# Altium PCB PCB1.PcbDoc
Units mm, origin at the board's own origin, x right, y up, seen from the top; angles counter-clockwise.
Board outline 41.25 x 43.63 mm, 2 copper layers (Top Layer, Bottom Layer); 10 components, 13 nets, 62 pads, 15 vias.
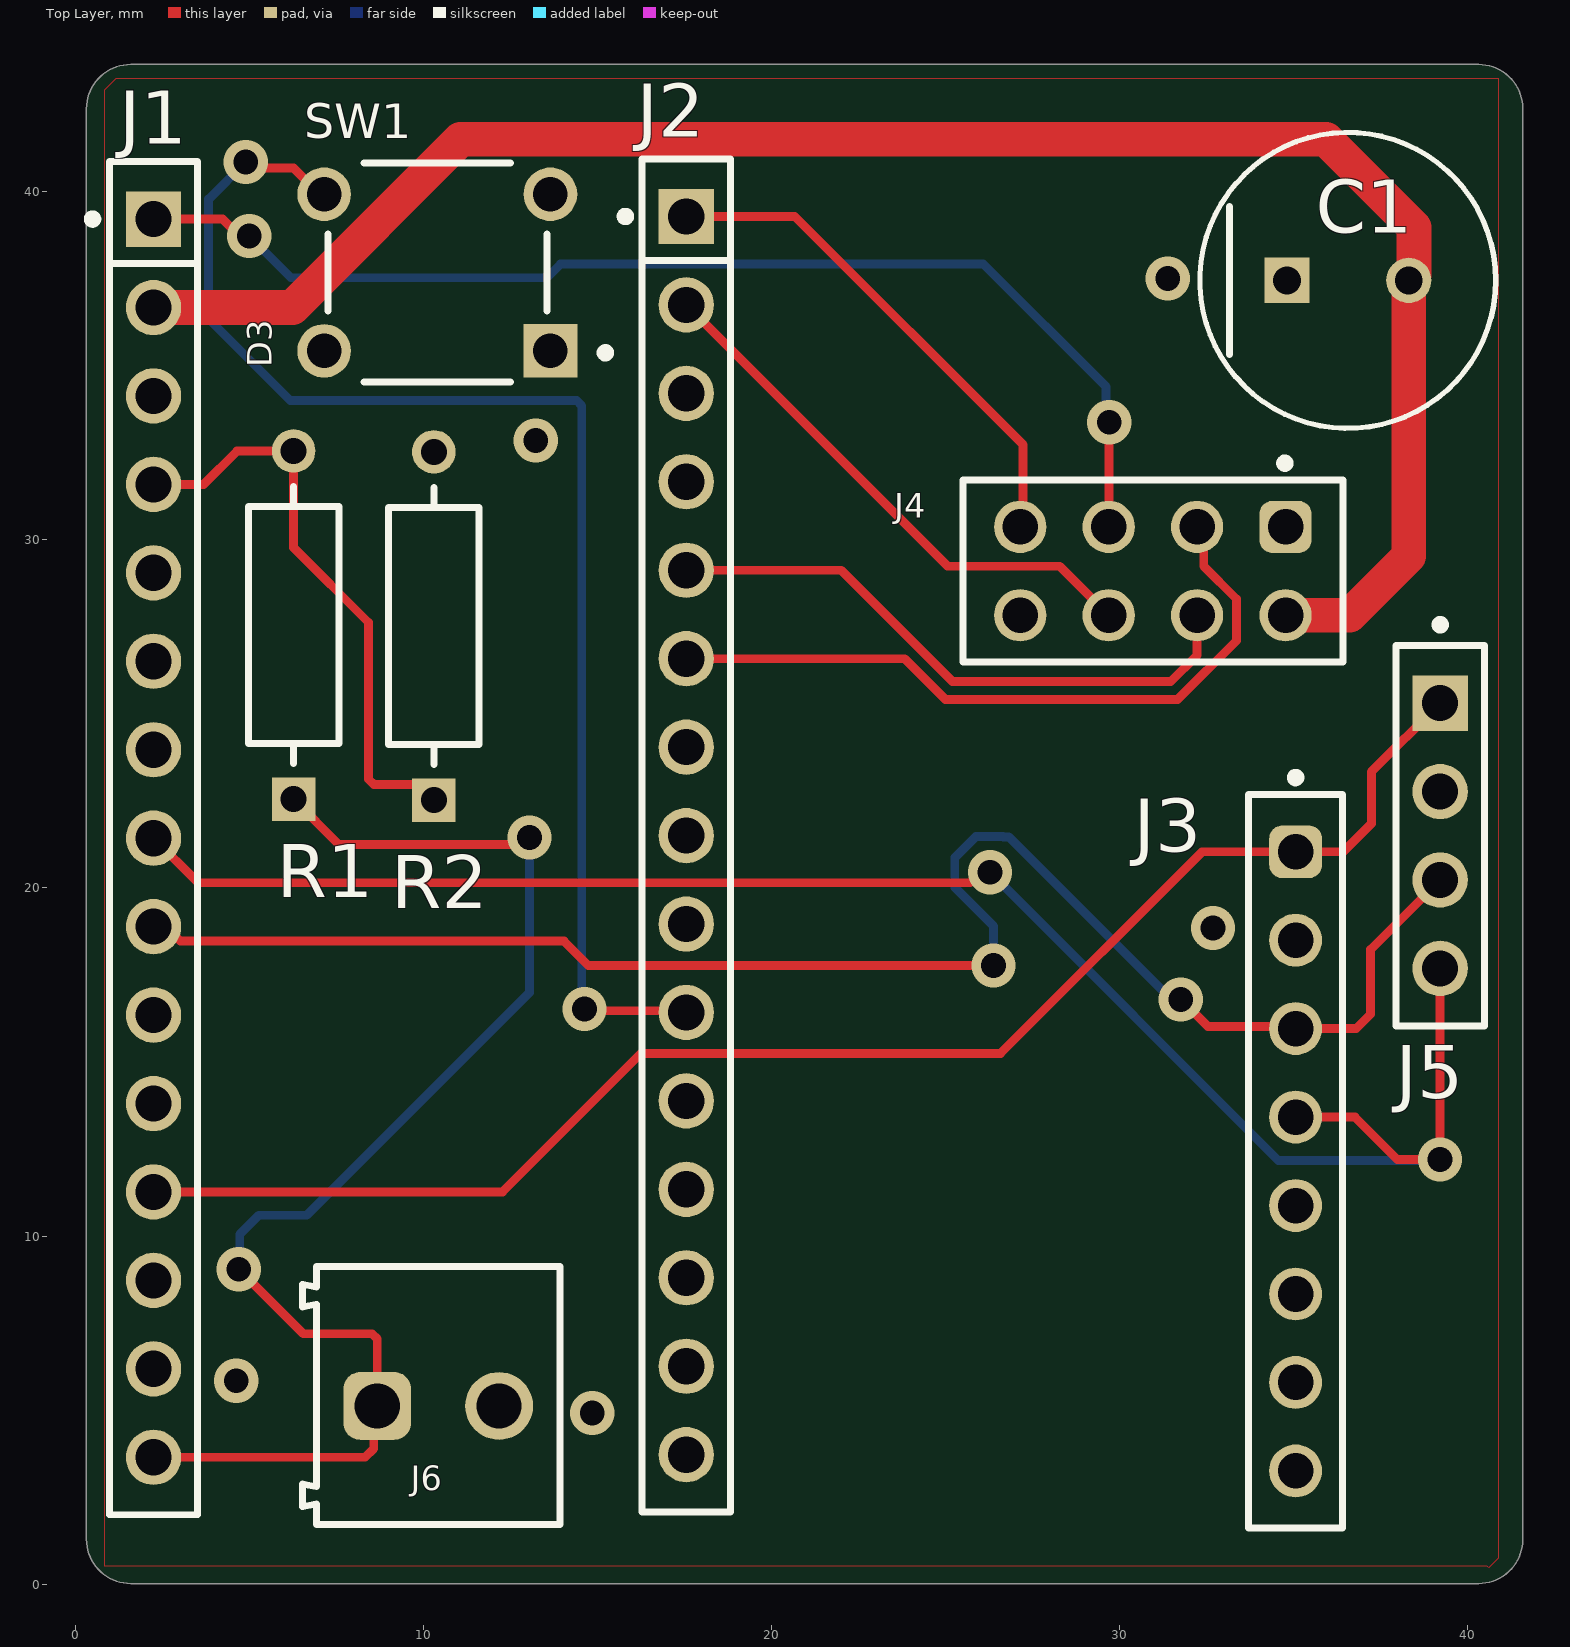
[diagram p0: Top Layer view]
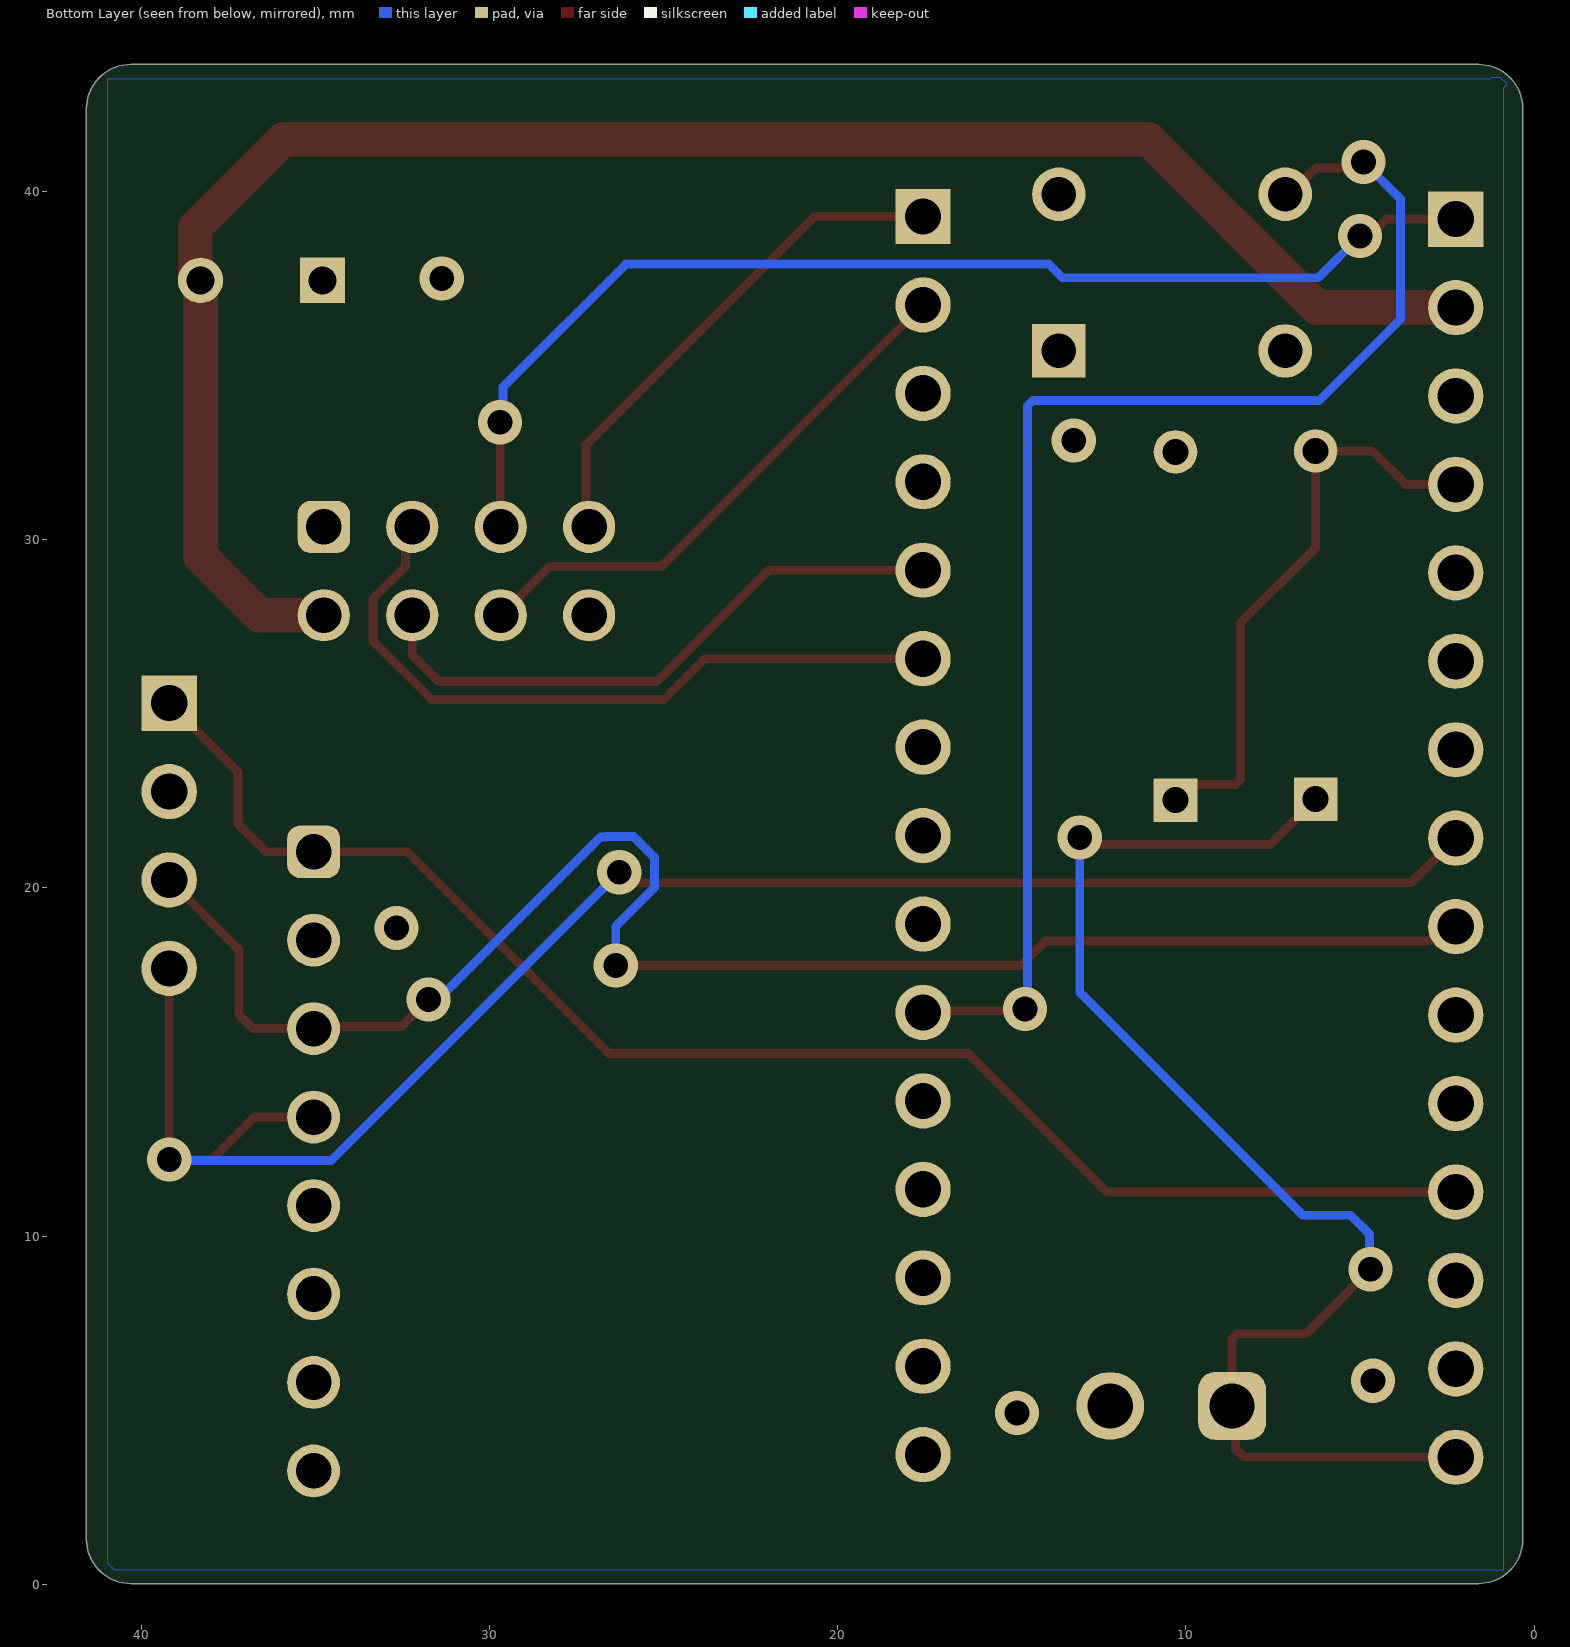
[diagram p1: Bottom Layer view, seen from below]
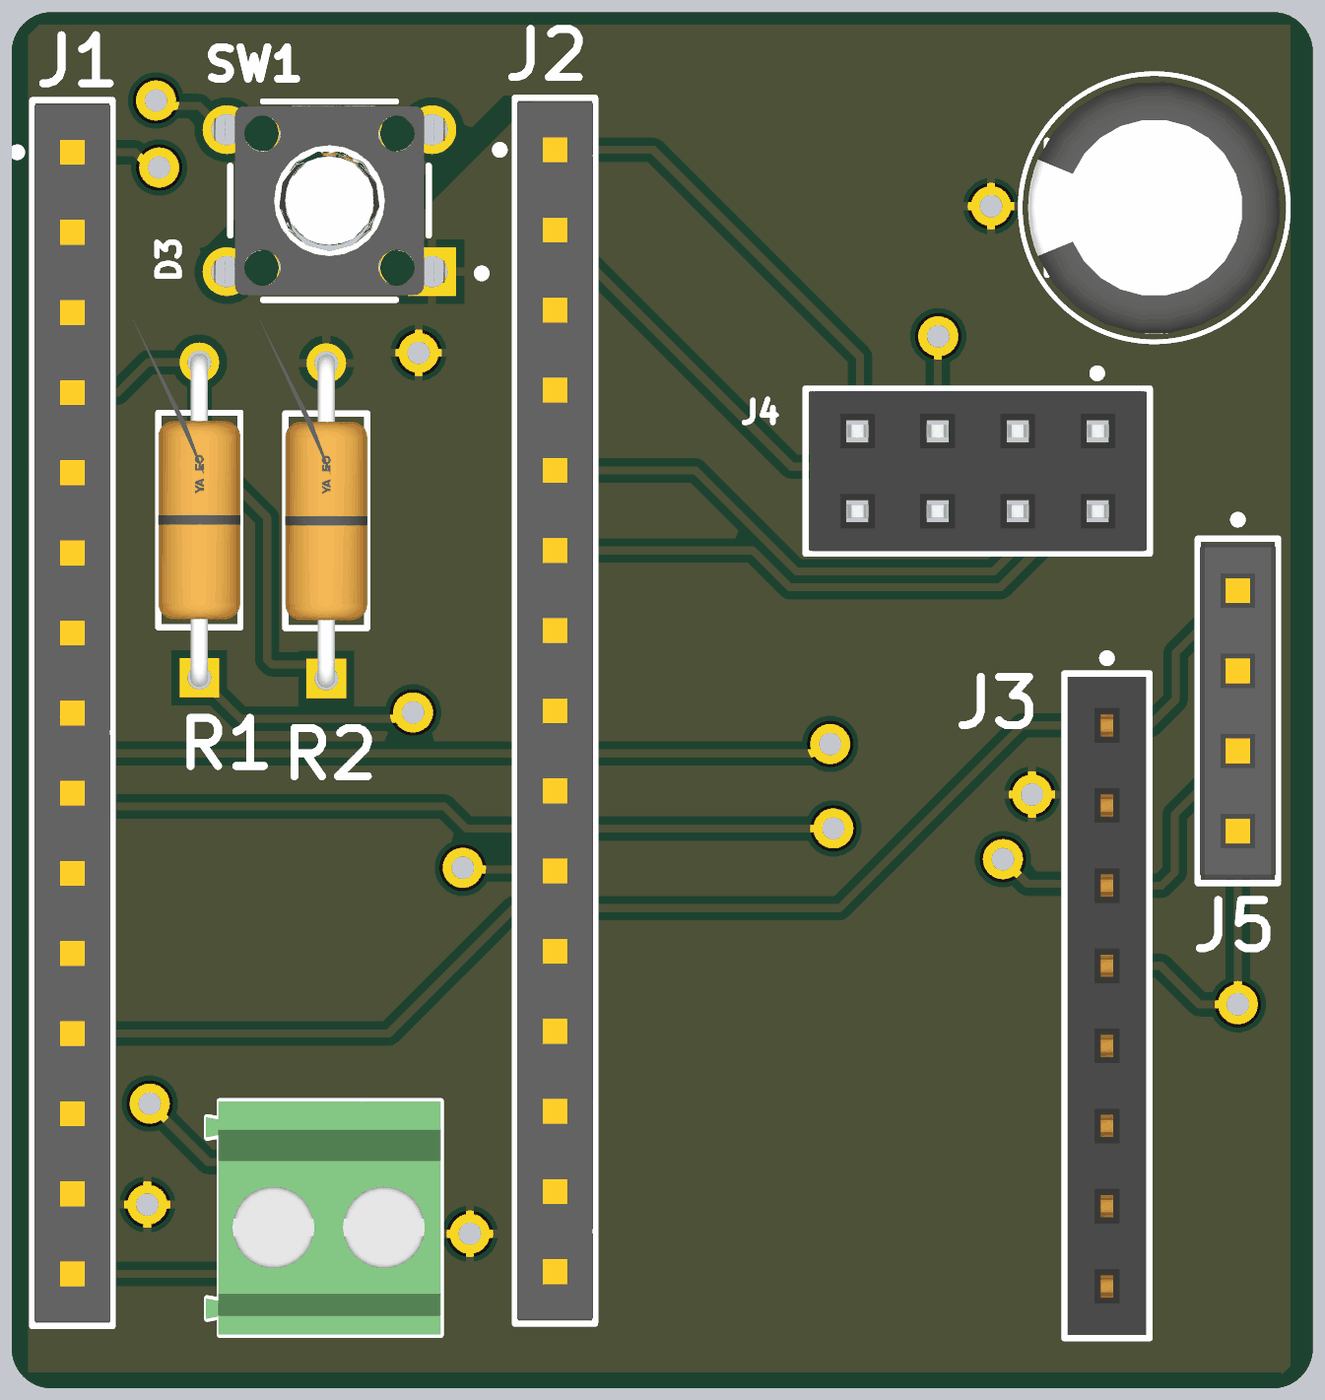
[diagram p2: 3D render of the assembled board from above, using the file's embedded part models]

## Layer stack, top to bottom
Top Solder: solder mask 0.0102, Solder Resist, Dk 3.5
Top Layer: signal copper 0.0356
Dielectric 1: dielectric 0.32, FR-4, Dk 4.8
Bottom Layer: signal copper 0.0356
Bottom Solder: solder mask 0.0102, Solder Resist, Dk 3.5

## Board outline
0.325,1.295 0.325,42.38 cw(c1.595,42.38) 1.595,43.65 40.305,43.65 cw(c40.305,42.38) 41.575,42.38 41.575,1.295 cw(c40.305,1.295) 40.305,0.025 1.595,0.025 cw(c1.595,1.295)

## Design rules (kind name [scope] priority, off if disabled: settings)
Clearance [All] p1: gap=0.254 ignorepadtopadclearanceinfootprint=FALSE
PolygonConnect [All] p1: connectstyle=Relief reliefconductorwidth=0.254 reliefentries=4 polygonreliefangle="90 Angle" airgapwidth=0.254
RoutingVias [All] p1: holewidth=0.711 width=1.27 viastyle="Through Hole" minholewidth=0.711 minwidth=1.27 maxholewidth=0.711 maxwidth=1.27
SolderMaskExpansion [All] p1: expansion=0.102 istentingtop=FALSE
SupplyNets "Schematic Supply Nets_3" [InNet('GND')] p1: voltage=0.000
SupplyNets "Schematic Supply Nets_2" [InNet('+3V3')] p2: voltage=0.000
SupplyNets "Schematic Supply Nets_1" [InNet('+5V')] p3: voltage=0.000
SupplyNets "Schematic Supply Nets" [InNet('VIN')] p4: voltage=0.000
Width [All] p1: maxlimit=1 minlimit=0.254 preferedwidth=0.254
30 further rules are at their usual default settings.

## Components (designator, comment, footprint, x,y, rotation, side; value= is the part's Value field where it differs from the comment)
C1 "100uF 50V" FP-EEU-FR1H101B-MFG 36.55,37.45 r0 top
J1 "SSW-115-01-T-S" FP-SSW-115-01-T-S-MFG 2.25,21.43 r270 top locked
J2 "SSW-115-01-T-S" FP-SSW-115-01-T-S-MFG 17.55,21.505 r270 top locked
J3 "Header MPU6050" 61300811821 35.05,12.15 r270 top
J4 "nRF24 Header" 61300821821 30.95,29.1 r180 top
J5 "Header OLED" FP-SSW-104-02-G-S-MFG 39.2,21.5 r270 top
J6 "691214110002" 691214110002 10.425,5.425 r0 top
R1 "" FP-ZOR-25-R-52-0R-MFG 6.275,27.55 r90 top
R2 "2x 10KR" FP-ZOR-25-R-52-0R-MFG 10.3,27.525 r90 top
SW1 "Button" FP-2-1825910-7-MFG 10.4,37.675 r270 top

## Footprints (in the part's own frame and the unit in brackets; to place one, negate y for a bottom-side part, rotate by r counter-clockwise, add the part's x,y. Pads: shape width x height; smd on the part's side, far side on the other; paste and mask are expansions set on the pad)
61300811821 [mm] "Socket Header, Pitch 2.54 mm, THT, Vertical, single row, 8p"
  rrect50% 1.52x1.52 hole 1.02: 1(-8.89,0)
  round 1.52 hole 1.02: 2(-6.35,0) 3(-3.81,0) 4(-1.27,0) 5(1.27,0) 6(3.81,0) 7(6.35,0) 8(8.89,0)
  silkscreen extent -11.14,-1.35 10.54,1.35, body extent -10.41,-1.25 10.41,1.25, height 8.55
61300821821 [mm] "Socket Header, Pitch 2.54 mm, THT, Vertical, dual row, 8p"
  rrect50% 1.5x1.5 hole 1.02: 1(-3.81,-1.27)
  round 1.5 hole 1.02: 2(-3.81,1.27) 3(-1.27,-1.27) 4(-1.27,1.27) 5(1.27,-1.27) 6(1.27,1.27) 7(3.81,-1.27) 8(3.81,1.27)
  silkscreen extent -5.46,-3.22 5.46,2.62, body extent -5.33,-2.54 5.33,2.54, height 8.45
691214110002 [mm] "3.50 mm Horizontal Entry Modular, 2p"
  rrect50% 1.95x1.95 hole 1.3: 1(-1.75,-0.3)
  round 1.95 hole 1.3: 2(1.75,-0.3)
  silkscreen extent -3.9,-3.7 3.5,3.7, body extent -3.95,-3.7 3.5,3.7, height 8.55
FP-2-1825910-7-MFG [mm]
  rect 1.54x1.54 hole 0.99 paste-2539.97 mask+0: 1(2.25,3.25)
  round 1.54 hole 0.99 paste-2539.97 mask+0: 2(2.25,-3.25) 3(-2.25,3.25) 4(-2.25,-3.25)
  silkscreen extent -3.15,-3.15 3.15,4.95, body extent -3.24,-4.12 3.24,4.12, height 0.25
FP-EEU-FR1H101B-MFG [mm]
  rect 1.3x1.3 hole 0.8 paste-2539.97 mask+0: 1(-1.75,0)
  round 1.3 hole 0.8 paste-2539.97 mask+0: 2(1.75,0)
  silkscreen extent -4.25,-4.25 4.25,4.25, body extent -4.35,-4.35 4.35,4.35, height 0.25
FP-SSW-104-02-G-S-MFG [mm]
  rect 1.59x1.59 hole 1.04 paste-2539.97 mask+0: 1(-3.81,0)
  round 1.59 hole 1.04 paste-2539.97 mask+0: 2(-1.27,0) 3(1.27,0) 4(3.81,0)
  silkscreen extent -6.18,-1.27 5.46,1.27, body extent -5.56,-1.37 5.56,1.37, height 0.25
FP-SSW-115-01-T-S-MFG [mm]
  rect 1.59x1.59 hole 1.04 paste-2539.97 mask+0: 1(-17.78,0)
  round 1.59 hole 1.04 paste-2539.97 mask+0: 2(-15.24,0) 3(-12.7,0) 4(-10.16,0) 5(-7.62,0) 6(-5.08,0) 7(-2.54,0) 8(0,0) 9(2.54,0) 10(5.08,0) 11(7.62,0) 12(10.16,0) 13(12.7,0) 14(15.24,0) 15(17.78,0)
  silkscreen extent -19.43,-1.87 19.43,1.27, body extent -19.53,-1.37 19.53,1.37, height 0.25
FP-ZOR-25-R-52-0R-MFG [mm]
  rect 1.25x1.25 hole 0.75 paste-2539.97 mask+0: 1(-5,0)
  round 1.25 hole 0.75 paste-2539.97 mask+0: 2(5,0)
  silkscreen extent -3.98,-1.3 3.98,1.3, body extent -5.72,-1.4 5.72,1.4, height 0.25

## Part data
C1: library part CMP-05427-000020-1, "CAP ALUM 100UF 20% 50V RADIAL", Capacitance=100uF, Case/Package=Radial, ESR (Equivalent Series Resistance)=61mR, Max Operating Temperature=105°C, Min Operating Temperature=-40°C, Package Quantity=1, Ripple Current=870mA, Tolerance=20%, Voltage Rating=50V, Contact Plating=Tin, Diameter=8mm, Features="General Purpose", Height=11.5mm, Height - Seated (Max)=0.512inch, Impedance=61mR, Lead Diameter=0.6mm, Lead Free="Lead Free", Lead Pitch=5mm, Length=11.5mm, Life (Hours)=6000Hour, Mount="Through Hole", Packaging="Tape and Reel", Radiation Hardening=No, REACH SVHC="No SVHC", RoHS Compliant=Yes, Series=FR, Termination=Radial, Voltage Rating (DC)=50V
J1 J2: library part CMP-02766-001723-1, "CONN RCPT 15POS 0.1 TIN PCB", Color=Black, Contact Resistance=10mR, Max Current Rating=6.9A, Max Operating Temperature=105°C, Max Voltage Rating (AC)=550V, Min Operating Temperature=-55°C, Connector Type=Receptacle, Contact Material=Bronze, Contact Plating=Tin, Contact Type="Female Socket", Depth=2.41mm, Gender=Receptacle, Housing Color=Black, Housing Material=Polymer, Lead Free="Lead Free", Length=38.61mm, Mating Cycles=100, Mount="Through Hole", Number of Contacts=15, Number of Positions=15, Number of Rows=1, Orientation=Straight, Packaging=Bulk, Pitch=0.1inch, Radiation Hardening=No, REACH SVHC="No SVHC", RoHS Compliant=Yes, Series=SSW, Termination=Solder, Width=2.41mm
J3: library part CMP-1502-01327-3, Contact Resistance=20mΩ, Current Rating=3A, Operating Supply Voltage=250V, Gender=Female, Lead Pitch=2.54mm, NexarPartId=61924723, Number of Pins=8, Orientation=Vertical, RoHS=Non-Compliant
J4: library part CMP-1502-01329-3, Contact Resistance=20mΩ, Current Rating=3A, Operating Supply Voltage=250V, Gender=Female, Lead Pitch=2.54mm, NexarPartId=61924725, Number of Pins=8, Orientation=Vertical, RoHS=Non-Compliant
J5: library part CMP-00575-00296407-1, "SSW-104-02-G-S Board to Board & Mezzanine Connectors Tiger Buy Socket Strip with PCB Tails, .100 Pitch", Color=Black, Contact Resistance=10mΩ, Current Rating=4.7A, Manufacturer Lifecycle Status=PRODUCTION, Max Current Rating=6.9A, Max Operating Temperature=125°C, Max Voltage Rating (AC)=550V, Min Operating Temperature=-55°C, Voltage Rating (AC)=465V, Voltage Rating (DC)=655V, Connector Type="Receptacle, Socket", Contact Material="Bronze, Gold, Nickel", Contact Plating=Gold, Depth=2.41mm, Gender=Receptacle, Height=8.64mm, Housing Color=Black, Housing Material=Polymer, Lead Free="Lead Free", Lead Pitch=2.54mm, Length=10.67mm, Lifecycle Status=Production, Mount="Through Hole", NexarPartId=296407, Number of Contacts=4, Number of Positions=4, Number of Rows=1, Orientation=Straight, Packaging=Bulk, Pitch=2.54mm, Radiation Hardening=No, REACH SVHC="No SVHC", RoHS=Compliant, Termination=Solder, Voltage Rating=550V, Width=2.41mm
J6: library part CMP-1502-02464-2, Color="Blue, Green", Current=10A, Max Operating Temperature=105°C, Min Operating Temperature=-40°C, Voltage=300V, Contact Material=Brass, Contact Plating="Brass, Tin", Current Rating=10A, Height=8.7mm, Housing Material=Nylon, Lead Pitch=3.5mm, Length=7.4mm, Mount="Through Hole", NexarPartId=18818288, Number of Contacts=2, Number of Levels=1, Number of Pins=2, Number of Positions Per Level=2, Number of Rows=1, Packaging=Box, Pitch=3.5052mm, Plating="Brass, Steel", REACH SVHC=Unknown, RoHS=Compliant, Stripping Length=-6mm, Termination=Screw, Voltage Rating=300V, Width=7.9mm, Wire Gauge (Max)=24AWG, Wire Gauge (Min)=16AWG, Wire/Cable Gauge=24AWG
R1 R2: library part CMP-03413-000010-1, "RES 0 OHM JUMPER 1/4W AXIAL", Case/Package=Axial, Max Operating Temperature=155°C, Max Power Dissipation=250mW, Min Operating Temperature=-55°C, Package Quantity=5000, Resistance=0mR, Resistor Type="Carbon Film", Temperature Coefficient=100ppm/°C, Tolerance=5%, Construction=Cylindrical, Lead Free="Lead Free", Length=0.248inch, Military Standard=Not, Number of Terminations=2, Packaging="Tape and Reel", Power Rating=250mW, RoHS Compliant=Yes, Series=ZOR, Termination=Axial
SW1: library part CMP-03402-000004-1, "SWITCH TACTILE SPST-NO 0.05A 24V", Contact Current Rating=50mA, Contact Resistance=100mΩ, Manufacturer="TE Connectivity", Manufacturer Part Number=2-1825910-7, Operating Force=160gf, Temperature="-35°C to +85°C", Temperature Range High=+85°C, Temperature Range Low=-35°C, Voltage Rating Dc=24V, Automotive=No, Category=Switch, ComponentLink2Description=Datasheet, ComponentLink2URL=https://www.te.com/commerce/DocumentDelivery/DDEController?Action=showdoc&DocId=Customer+Drawing%7F1825910%7FC10%7Fpdf%7FEnglish%7FENG_CD_1825910_C10.pdf%7F2-1825910-7, Device Class L1=Electromechanical, Device Class L2=Switches, Device Class L3="Pushbutton Switches", Digikey Description="SWITCH TACTILE SPST-NO 0.05A 24V", Electromechanical Life=100000Cycles, Height=13.3mm, Lead Free=Yes, Mount="Through Hole", Mouser Description="Switch Tactile OFF (ON) SPST Extended Round Button PC Pins 0.05A 24VDC 100000Cycles 1.57N Thru-Hole Loose", Octopart=https://octopart.com/2-1825910-7-te+connectivity-42270510, Package=2-1825910-7, RoHS=TRUE, Throw Configuration=SPST-NO

## Via types
v1: diameter 1.27, hole 0.711, Top Layer to Bottom Layer, 15 vias

## Nets (pads, with @x,y where several pads share a name; then routed paths per layer and width w, separated by ;. In a path a pad name is that pad's centre, name@x,y a point inside that pad or via, vN(x,y) a via of type N, cw(c..) or ccw(c..) an arc to the next point about the centre after c; other vN are vias at no path point)
+3V3: C1.2 J1.2 J4.2 | length 53
  Top Layer w1: J1.2 6.24,36.67 11.07,41.5 35.925,41.5 38.45,38.975 38.45,37.6 C1.2 38.3,29.525 36.605,27.83 J4.2
+5V: J1.12 J3.1 J5.1 | length 43.6
  Top Layer w0.254: J1.12 12.27,11.27 16.249,15.249 26.574,15.249 32.365,21.04 J3.1 36.415,21.04 37.225,21.85 37.225,23.335 J5.1
GND: C1.1 J1.14 J2.12 J3.2 J4.1 J5.2 J6.2 R2.2 SW1.1
  other v1: 14.85,4.925 4.625,5.85 32.675,18.85 13.225,32.85 31.375,37.5
NetJ1_1: J1.1 J4.5 | length 33.8
  Top Layer w0.254: J1.1 4.24,39.21 4.725,38.725 v1(5,38.725) ; J4.5 29.69,30.38 29.69,33.365 v1(29.7,33.375)
  Bottom Layer w0.254: v1(5,38.725) 6.2,37.525 13.546,37.525 13.942,37.921 26.079,37.921 29.609,34.391 29.609,33.466 v1(29.7,33.375)
NetJ1_4: J1.4 R1.2 R2.1 | length 16.8
  Top Layer w0.254: J1.4 3.69,31.59 4.65,32.55 R1.2 6.275,29.775 8.425,27.625 8.425,23.124 8.574,22.975 10.075,22.975 R2.1@10.3,22.75
NetJ1_8: J1.8 J3.4 J5.4 | length 51.2
  Top Layer w0.254: J1.8 3.53,20.15 25.7,20.15 26,20.45 v1(26.275,20.45) ; J3.4 36.755,13.42 37.975,12.2 v1(39.2,12.2) J5.4
  Bottom Layer w0.254: v1(26.275,20.45) 34.55,12.175 39.175,12.175 v1(39.2,12.2)
NetJ1_9: J1.9 J3.3 J5.3 | length 47.5
  Top Layer w0.254: J1.9 2.612,18.89 3.027,18.475 14.038,18.475 14.738,17.775 v1(26.375,17.775) ; v1(31.75,16.8) 32.525,16.025 34.985,16.025 J3.3 36.785,15.96 37.2,16.375 37.2,18.23 J5.3
  Bottom Layer w0.254: v1(26.375,17.775) 26.375,18.902 25.259,20.018 25.259,20.871 25.863,21.475 26.65,21.475 26.659,21.466 26.809,21.466 31.475,16.8 v1(31.75,16.8)
NetJ2_1: J2.1 J4.7 | length 14.8
  Top Layer w0.254: J2.1 20.665,39.285 27.225,32.725 27.225,30.455 J4.7
NetJ2_2: J2.2 J4.6 | length 15.8
  Top Layer w0.254: J2.2 25.056,29.239 28.271,29.239 J4.6
NetJ2_5: J2.5 J4.4 | length 17.5
  Top Layer w0.254: J2.5 22,29.125 25.2,25.925 31.457,25.925 32.22,26.688 J4.4
NetJ2_6: J2.6 J4.3 | length 20.7
  Top Layer w0.254: J2.6 23.822,26.585 24.99,25.417 31.667,25.417 33.351,27.101 33.351,28.298 32.41,29.239 32.41,30.18 J4.3
NetJ2_10: J2.10 SW1.4 | length 39.7
  Top Layer w0.254: v1(4.9,40.85) 5.075,40.675 6.272,40.675 7.022,39.925 SW1.4 ; v1(14.625,16.525) 14.675,16.475 17.5,16.475 J2.10
  Bottom Layer w0.254: v1(4.9,40.85) 3.834,39.784 3.834,36.341 6.175,34 14.4,34 14.55,33.85 14.55,16.65 14.625,16.575 v1(14.625,16.525)
VIN: J1.15 J6.1 R1.1 | length 38.5
  Top Layer w0.254: J1.15 8.325,3.65 8.575,3.9 8.575,5.025 J6.1 8.675,7.051 8.526,7.2 6.55,7.2 v1(4.7,9.05) ; R1.1 7.575,21.25 12.525,21.25 12.531,21.256 12.856,21.256 v1(13.05,21.45)
  Bottom Layer w0.254: v1(4.7,9.05) 4.725,9.075 4.725,10.05 5.275,10.6 6.65,10.6 13.05,17 v1(13.05,21.45)
pads on no net: J1.3 J1.5 J1.6 J1.7 J1.10 J1.11 J1.13 J2.3 J2.4 J2.7 J2.8 J2.9 J2.11 J2.13 J2.14 J2.15 J3.5 J3.6 J3.7 J3.8 J4.8 SW1.2 SW1.3

## Polygon pours and split planes (outlines as drawn)
GND on Top Layer "NONET_L01_P000" (solid, shelved, pour order 0): 40.875,43.25 40.875,0.75 40.6,0.475 40.55,0.525 0.85,0.525 0.85,42.925 1.175,43.25
GND on Bottom Layer "NONET_L02_P001" (solid, shelved, pour order 1): 1.275,43.225 40.975,43.225 40.975,0.625 40.775,0.425 0.875,0.425 0.875,42.975 0.775,43.075 0.975,43.275 1.225,43.275

## Silkscreen, mask and mechanical layers (free items; w line width, h text height)
Top Overlay:
  text "D3" at 5.646,34.954 h0.7 r90
Mechanical 1:
  lines w0.254: 1.635,43.65 40.305,43.65 cw(c40.305,42.38) 41.575,42.38 41.575,1.295 cw(c40.305,1.295) 40.305,0.025 1.595,0.025 cw(c1.595,1.295) 0.325,1.295 0.325,42.38 cw(c1.595,42.38) 1.595,43.65 1.675,43.65